# Altium PCB PCB_PDB_V3.PcbDoc (part 2 of 2)
Units mm, origin at the board's own origin, x right, y up, seen from the top; angles counter-clockwise.
Board outline 69.91 x 59.83 mm, 4 copper layers (Top Layer, Int1, Int2, Bottom Layer), stack 1.439 mm thick; 93 components, 38 nets, 246 pads, 118 vias.
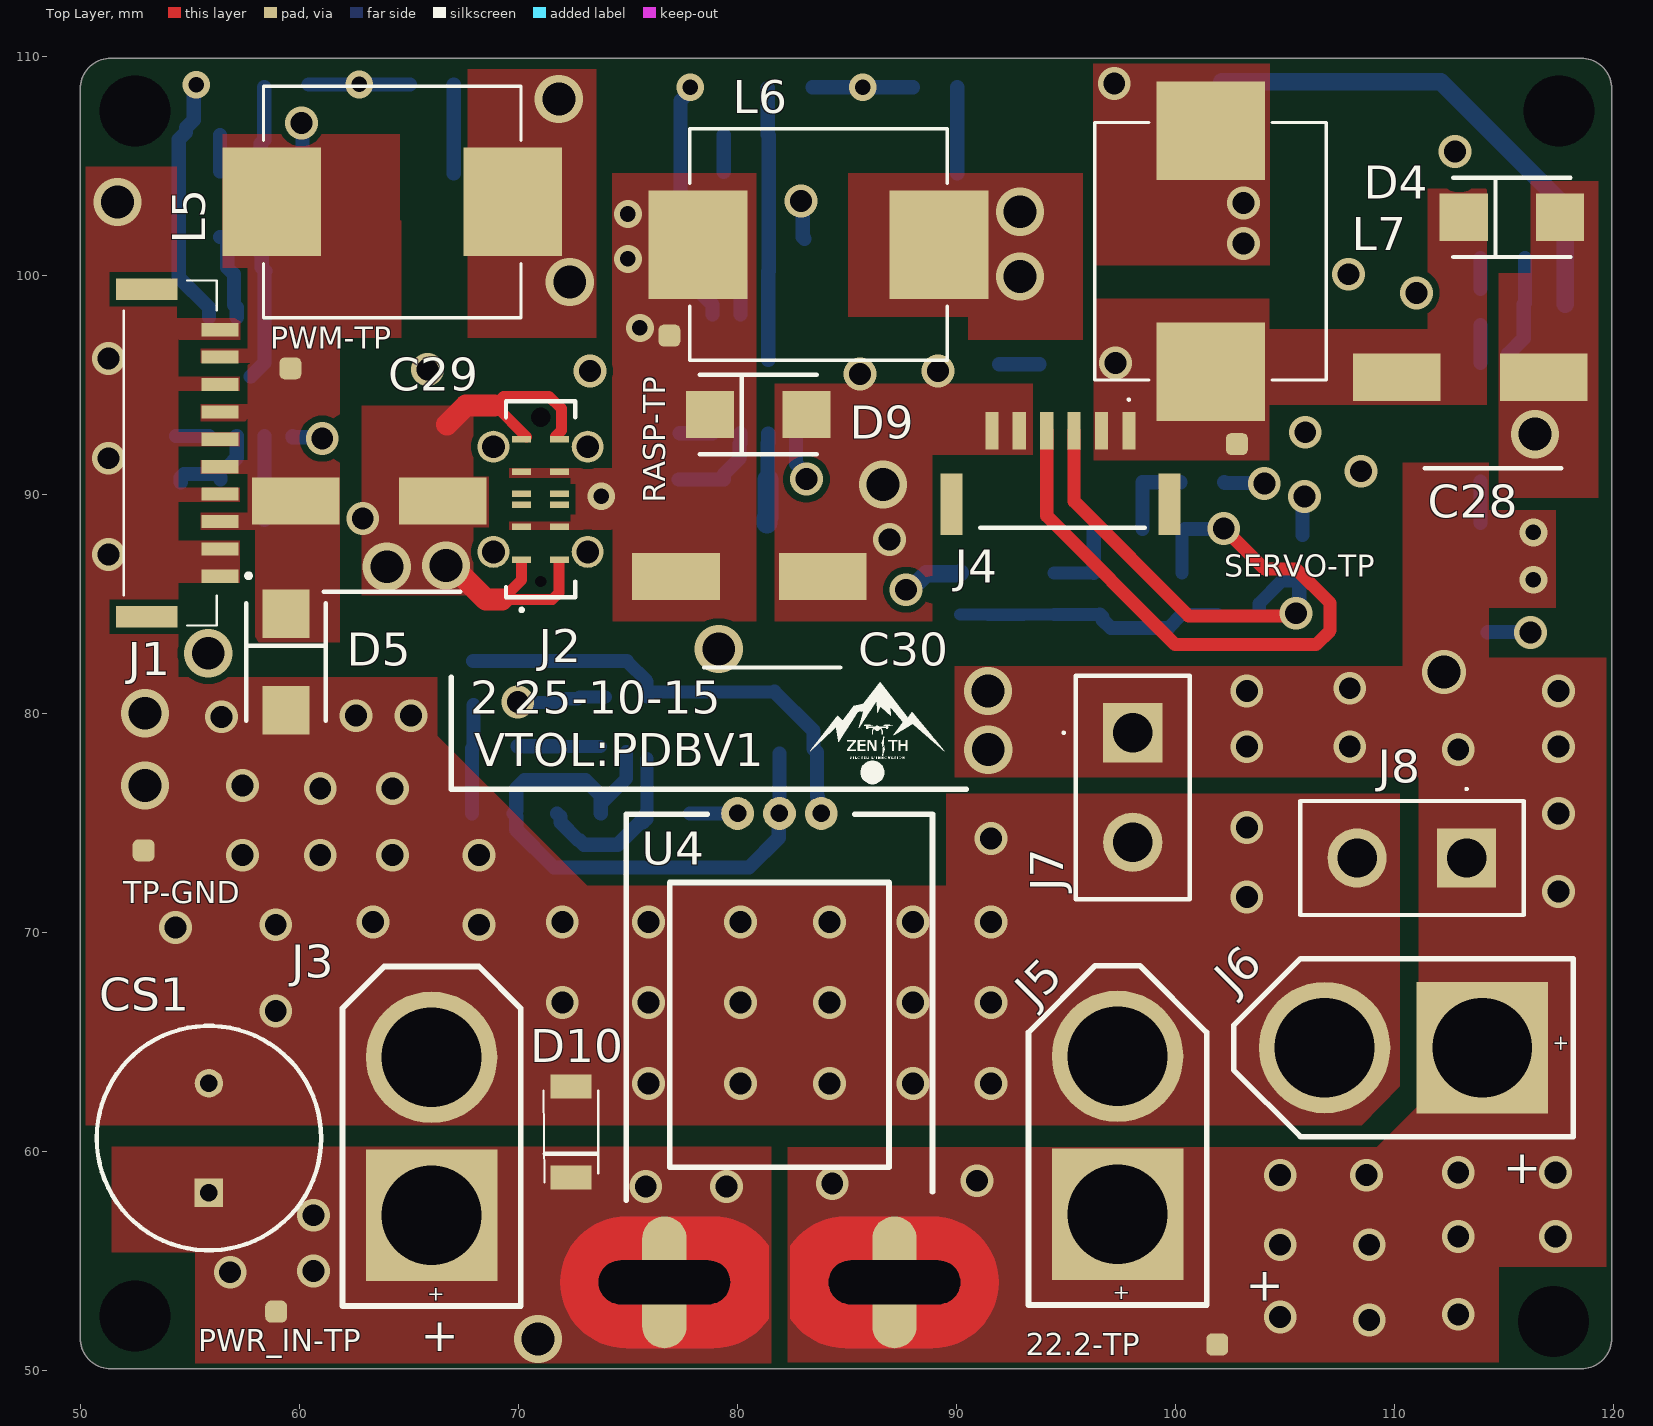
[diagram p0: Top Layer view]

## Polygon pours and split planes (outlines as drawn) (continued)
"+5V PIXHAWK" on Top Layer "+5V_PIXHAWK_L01_P123" (solid, pour order 123): 104.267,94.1 114.2,94.1 114.2,103.9 114.15,103.95 111.5,103.95 111.5,97.55 104.267,97.55 104.267,98.933 96.266,98.933 96.266,91.567 104.267,91.567
+5V_RASP on Int1 "+5V_RASP_L02_P122" (solid, pour order 122): 77.089,98.1 80.85,98.1 80.85,104.65 74.295,104.65 74.295,91.186 69.215,91.186 69.215,88.392 77.089,88.392
NetC13_2 on Int1 "NETC13_2_L02_P121" (solid, pour order 121): 85.05,98.1 85.05,104.65 95.758,104.65 95.758,98.1
PWR_IN on Int1 "PWR_IN_L02_P137" (solid, pour order 137): 81.534,50 55.245,50 55.245,55.372 51.435,55.372 51.435,60.198 81.534,60.198
"+22.2V BATTERY" on Int1 "+22.2V_BATTERY_L02_P129" (solid, pour order 129): 109.5,60.198 109.5,60.2 111.379,62.1 111.379,77.089 89.916,77.089 89.916,82.55 110.363,82.55 110.363,91.44 114.3,91.44 114.3,89.281 117.348,89.281 117.348,84.836 114.3,84.836 114.3,82.55 120.015,82.55 120.015,54.75 114.8,54.75 114.8,50.038 82.296,50.038 82.296,60.198
NetC1_1 on Int1 "NETC1_1_L02_P143" (solid, pour order 143): 112.776,103.632 112.808,103.6 113.95,103.6 113.95,105.35 112.3,107.061 106.299,107.061 106.299,97.028 111.887,97.028 111.887,103.632
GND on Int1 "GND_L02_P139" (solid, pour order 139): 110.236,63 108.5,61.214 51.435,61.214 51.435,81.661 51.562,81.534 66.294,81.534 66.294,78.994 73.152,72.136 89.535,72.136 89.535,76.327 110.236,76.327
"+22.2V BATTERY" on Int1 "+22.2V_BATTERY_L02_P133" (solid, pour order 133): 59.182,92.837 54.483,92.837 54.356,92.71 54.356,82.169 59.182,82.169
"+22.2V BATTERY" on Int1 "+22.2V_BATTERY_L02_P132" (solid, pour order 132): 77.7,81.45 77.7,87.9 80.8,87.9 80.8,81.45
GND on Int2 "GND_L03_P138" (solid, pour order 138): 110.236,63 108.5,61.214 50,61.214 50,81.661 59.65,81.661 59.65,89.662 61.214,89.662 61.214,93.98 53.34,93.98 53.34,97.028 89.789,97.028 89.789,96.52 95.758,96.52 95.758,94.234 117.75,94.234 117.75,89.789 114.808,89.789 114.808,92.456 109.982,92.456 109.982,83.566 107.05,83.566 107.05,91.567 97.028,91.567 97.028,88.519 96.774,88.265 86.614,88.265 86.614,83.82 82.55,83.82 82.55,89.662 84.074,89.662 84.074,92.964 76.581,92.964 76.581,83.82 66.294,83.82 66.294,78.994 78.613,78.994 78.613,72.136 77.47,72.136 89.535,72.136 89.535,76.327 110.236,76.327
PWR_IN on Int2 "PWR_IN_L03_P135" (solid, pour order 135): 81.534,50 55.245,50 55.245,55.372 51.435,55.372 51.435,60.198 81.534,60.198
"+22.2V BATTERY" on Int2 "+22.2V_BATTERY_L03_P130" (solid, pour order 130): 109.5,60.198 109.5,60.2 111.379,62.1 111.379,77.089 89.916,77.089 89.916,82.55 110.363,82.55 110.363,91.44 114.3,91.44 114.3,89.281 117.348,89.281 117.348,84.836 114.3,84.836 114.3,82.55 120.015,82.55 120.015,54.75 114.8,54.75 114.8,50.038 82.296,50.038 82.296,60.198
NetC1_1 on Int2 "NETC1_1_L03_P142" (solid, pour order 142): 113.932,103.632 113.95,103.65 113.95,105.35 112.25,107.061 106.299,107.061 106.299,97.028 111.887,97.028 111.887,103.632
NetC2_2 on Int2 "NETC2_2_L03_P141" (solid, pour order 141): 96.266,99.15 96.266,109.728 104.267,109.728 104.267,99.15
"+22.2V BATTERY" on Int2 "+22.2V_BATTERY_L03_P134" (solid, pour order 134): 58.95,92.837 54.483,92.837 54.356,92.964 54.356,82.3 58.95,82.3
"+22.2V BATTERY" on Int2 "+22.2V_BATTERY_L03_P131" (solid, pour order 131): 77.216,80.25 77.216,92.329 81.915,92.329 81.915,80.25

## Silkscreen, mask and mechanical layers (free items; w line width, h text height)
Top Overlay:
  drawing of 37 lines, arcs and shapes, not listed
  text "2 25-10-15" at 67.8,80 h1.52
  text "VTOL:PDBV1" at 68,77.6 h1.52
  text "+" at 114.954,58.55 h1.52
  text "+" at 103.204,53.2 h1.52
  text "+" at 65.554,50.9 h1.52
Bottom Overlay:
  lines w0.254: 76.85,109.25 77.05,109.45 78.9,109.45 79.25,109.1 80.2,109.1 ; 79.8,109.45 79.85,109.45 80.2,109.1 ; 79.9,108.75 80.2,109.05 ; 80.1,108.95 80.1,109.2 80,109.3 80.2,109.1 ; 80.2,109.05 80.2,109.1 ; 80.2,109.05 80.2,109.1

## Text inside footprints (layer, text, board x,y; h text height)
J3: Top Overlay "+" at 65.844,53.193 h0.7
J5: Top Overlay "+" at 97.129,53.27 h0.7
J6: Top Overlay "+" at 117.88,64.529 h0.7 r90